# Altium PCB PCB1.PcbDoc
Units mm, origin at the board's own origin, x right, y up, seen from the top; angles counter-clockwise.
Board outline 43 x 27 mm, 2 copper layers (Top Layer, Bottom Layer); 11 components, 9 nets, 29 pads, 0 vias.
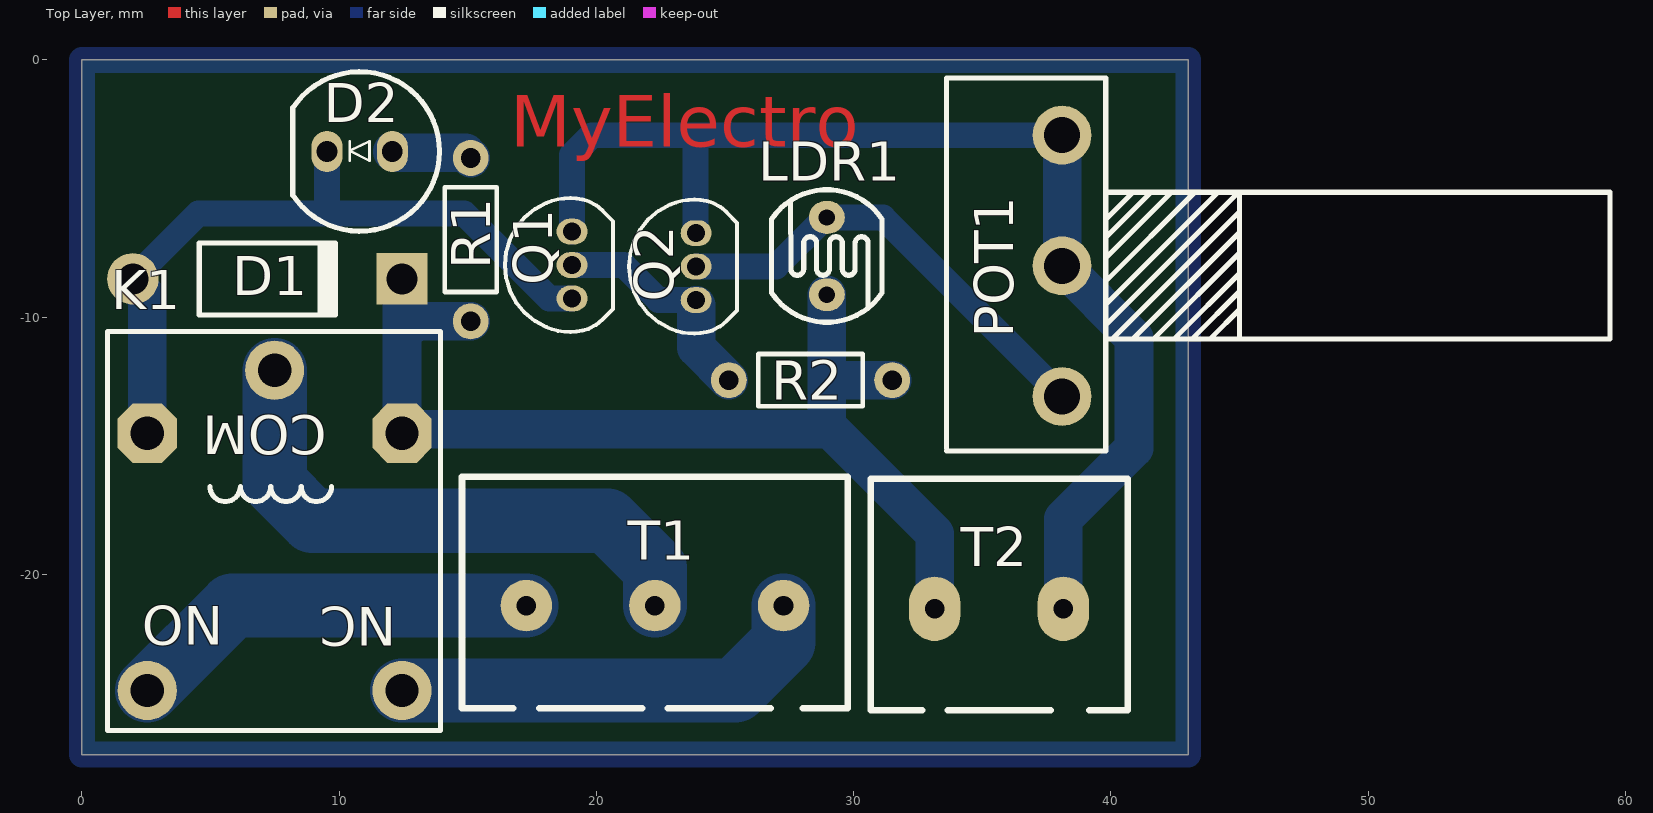
[diagram p0: Top Layer view]
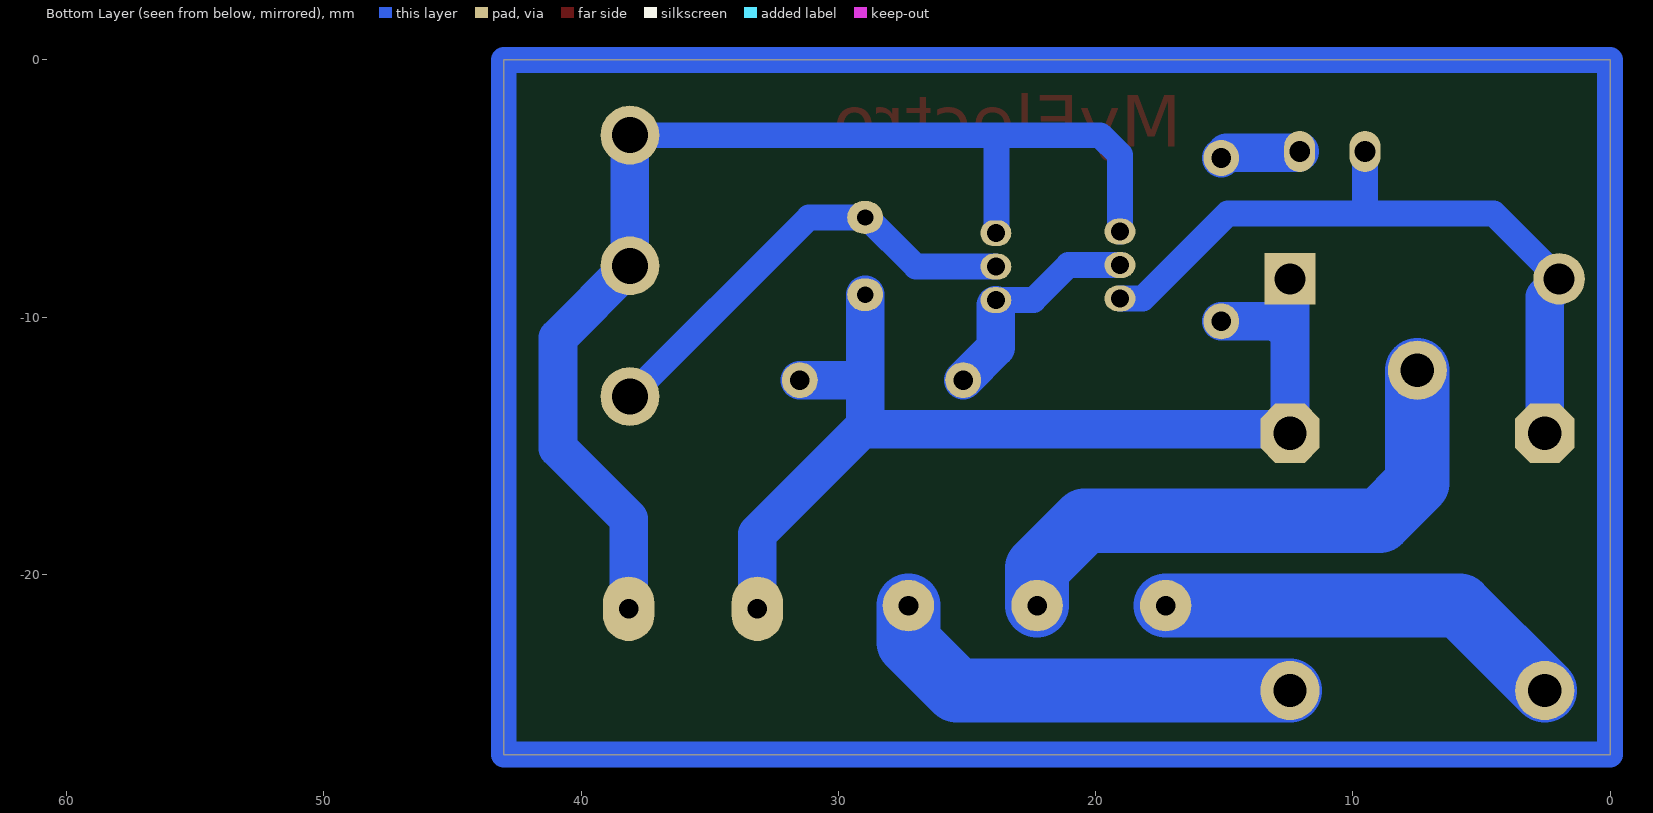
[diagram p1: Bottom Layer view, seen from below]

## Layer stack, top to bottom
Top Solder: solder mask 0.0102, Solder Resist, Dk 3.5
Top Layer: signal copper 0.0356
Dielectric 1: dielectric 0.32, FR-4, Dk 4.8
Bottom Layer: signal copper 0.0356
Bottom Solder: solder mask 0.0102, Solder Resist, Dk 3.5

## Board outline
0,-27 0,0 43,0 43,-27

## Design rules (kind name [scope] priority, off if disabled: settings)
Clearance [All] p1: gap=0.254 ignorepadtopadclearanceinfootprint=FALSE except(0: Arc-Hole Track-Hole SMDPad-Hole THPad-Hole Via-Hole Fill-Hole Poly-Hole Region-Hole Text-Hole)
PolygonConnect [All] p1: connectstyle=Relief reliefconductorwidth=0.254 reliefentries=4 polygonreliefangle="90 Angle" airgapwidth=0.254
RoutingVias [All] p1: holewidth=0.711 width=1.27 viastyle="Through Hole" minholewidth=0.711 minwidth=1.27 maxholewidth=0.711 maxwidth=1.27
SolderMaskExpansion [All] p1: expansion=0.102 istentingtop=FALSE
Width [All] p1: maxlimit=2.5 minlimit=1 preferedwidth=1.5
30 further rules are at their usual default settings.

## Components (designator, comment, footprint, x,y, rotation, side; value= is the part's Value field where it differs from the comment)
D1 "Diode 1N4007" DO-41 7.21,-8.509 r0 top
D2 "LED 5MM" LED5MM_BLUE 10.795,-3.556 r180 top
K1 "Relay" "Relay 15.40x12.10x13.10" 7.49,-12.061 r180 top
LDR1 "PhotoCell" PhotoCell 28.956,-7.62 r270 top
POT1 "100K" POT 38.1,-13.081 r90 top
Q1 "BC547" "TO-92 STR" 19.05,-7.971 r90 top
Q2 "BC547" "TO-92 STR" 23.876,-8.031 r90 top
R1 "1K" RES-(1/4) 15.113,-6.985 r270 top
R2 "1K" RES-(1/4) 28.321,-12.446 r0 top
T1 "Terminal" "Terminal 1*3" 14.772,-25.209 r0 top
T2 "Terminal" "Terminal 1*2" 30.654,-25.273 r0 top

## Footprints (in the part's own frame and the unit in brackets; to place one, negate y for a bottom-side part, rotate by r counter-clockwise, add the part's x,y. Pads: shape width x height; smd on the part's side, far side on the other; paste and mask are expansions set on the pad)
DO-41 [mm] "Diode, Axial; Body 5.2 x 2.7 mm (LxDia. max), Lead Dia. 0.86 mm (max)"
  round 2 hole 1.2: 1(-5.23,0)
  rect 2x2 hole 1.2: 2(5.23,0)
  silkscreen extent -2.65,-1.4 2.75,1.4
LED5MM_BLUE [mm] "LED 5MM THROUGH HOLE BLUE-Designer Abbas Basereh"
  oval 1.2x1.6 hole 0.8: 1(-1.27,0) 2(1.27,0)
  silkscreen extent -3.1,-3.1 2.6,3.1, body extent -2.99,-2.98 2.43,3.04, height 12.31
PhotoCell [mm]
  oval 1.27x1.397 hole 0.635: 1(-1.5,0) 2(1.5,0)
  silkscreen extent -2.58,-2.15 2.58,2.15, body extent -2.61,-2.16 2.61,2.14, height 2.44
POT [mil] "Voloume"
  round 90 hole 55: 1(0,0) 2(400,0) 3(200,0)
  silkscreen extent -83,-839 487,177, body extent -109,-1132 511,193, height 926
"Relay 15.40x12.10x13.10" [mm]
  round 2.3 hole 1.3: 1(0,0) 2(-4.95,12.45) 3(4.95,12.45)
  oct 2.3x2.3 hole 1.3: 4(-4.95,2.45) 5(4.95,2.45)
  silkscreen extent -6.45,-1.5 6.5,14, body extent -6.05,-1.3 6.05,14, height 16.1
RES-(1/4) [mil]
  round 55 hole 30: 1(-125,0) 2(125,0)
  silkscreen extent -80,-40 80,40, body extent -135,-36 135,36, height 115
"Terminal 1*2" [mil]
  oval 78.74x98.43 hole 30: 1(98.15,155) 2(295,155)
  silkscreen extent 0,0 394,354
"Terminal 1*3" [mm]
  round 2 hole 0.762: 1(2.5,4) 2(7.5,4) 3(12.5,4)
  silkscreen extent 0,0 15,9
"TO-92 STR" [mm] "DESIGNER :ABBAS BASEREH"
  oval 1x1.2 hole 0.7 mask+0.06: 1(-1.3,0) 2(0,0) 3(1.3,0)
  silkscreen extent -2.6,-1.59 2.6,2.61, body extent -2.61,-1.59 2.61,2.61, height 10

## Part data
D1: "1 Amp General Purpose Rectifier", Code_JEDEC=DO-204-AL, ComponentLink1Description="Manufacturer Link", ComponentLink1URL=http://www.fairchildsemi.com/, ComponentLink2Description=Datasheet, ComponentLink2URL=http://www.fairchildsemi.com/ds/1N%2F1N4001.pdf, DatasheetVersion=1998, LatestRevisionDate=17-Jul-2002, LatestRevisionNote="Re-released for DXP Platform.", PackageDescription="Diode, Axial; Body 5.2 x 2.7 mm (LxDia. max), Lead Dia. 0.86 mm (max)", PackageReference=DO-41, PackageVersion=Aug-1999, Published=8-Jun-2000, Publisher="Altium Limited"
D2: "Light Emitting Diode", Data=16-12-2016, Designer="Abbas Basereh"
K1: library part "RELAY General", "Relay_SPDT POWER NEEDLE", Company=E.P.I.L, Design_Date=2011/10/31, Designer="Ali Hafizi"
LDR1: library part LDR, "Photo Cell- Variable Resistor With Light", Company="IPA CO.", Designer="Saeid Jorablo", Last Update Time=2008/07/17
POT1: library part POT, "Variable Resistor"
Q1 Q2: "NPN General-purpose Transistor", Data=27-12-2016, Desc.="Plastic Medium-Power. Silicon NPN Transistors", Designer="Abbas Basereh"
R1 R2: library part "RES DIP PACKAGE", "TOTAL DIP RESISTOR PACK", Designer="Ali Hafizi"
T1: library part "Terminal 1*3", "Terminal 3 Pin 250VAC 16A", ComponentLinkURL=www.picpars.com, Designer="Seyed Mohsen Ghasemain", E-mail=picpars@gmail.com
T2: library part "Terminal 1*2", "Terminal 2 Pin 250VAC 16A", ComponentLinkURL=www.picpars.com, Designer="Seyed Mohsen Ghasemain", E-mail=picpars@gmail.com

## Nets (pads, with @x,y where several pads share a name; then routed paths per layer and width w, separated by ;. In a path a pad name is that pad's centre, name@x,y a point inside that pad or via, vN(x,y) a via of type N, cw(c..) or ccw(c..) an arc to the next point about the centre after c; other vN are vias at no path point)
+12: D1.2 K1.4 LDR1.2 R1.2 R2.2 T2.1 | length 42.1
  Bottom Layer w1.5: D1.2 12.44,-10.668 ; R1.2 12.948,-10.16 12.44,-10.668 ; LDR1.2 28.956,-12.319 ; R2.2 29.083,-12.446 28.956,-12.319 ; T2.1 33.147,-18.415 29.083,-14.351 ; 12.44,-10.668 K1.4 12.6,-14.351 29.083,-14.351 ; 28.956,-12.319 28.956,-14.224 29.083,-14.351
GND: POT1.2 POT1.3 Q1.3 Q2.3 T2.2 | length 46.9
  Bottom Layer w1: Q1.3 19.05,-3.683 19.812,-2.921 23.846,-2.921 ; Q2.3 23.846,-6.731 23.846,-2.921 ; POT1.2 23.846,-2.921
  Bottom Layer w1.5: POT1.2 POT1.3 40.894,-10.795 40.894,-15.089 38.147,-17.836 T2.2
NetD1_1: D1.1 D2.2 K1.5 Q1.1 | length 28.2
  Bottom Layer w1: D1.1 4.52,-5.969 9.398,-5.969 ; D2.2 9.525,-5.842 9.398,-5.969 ; Q1.1 18.161,-9.271 14.859,-5.969 9.398,-5.969
  Bottom Layer w1.5: D1.1 1.98,-8.644 2.54,-9.204 K1.5
NetD2_1: D2.1 R1.1 | length 3.2
  Bottom Layer w1.5: D2.1 12.115,-3.606 14.909,-3.606 R1.1
NetK1_1: K1.1 T1.2 | length 22
  Bottom Layer w2.5: K1.1 7.49,-16.443 8.954,-17.907 20.43,-17.907 22.272,-19.749 T1.2
NetK1_2: K1.2 T1.3 | length 17
  Bottom Layer w2.5: K1.2 25.4,-24.511 27.272,-22.639 T1.3
NetK1_3: K1.3 T1.1 | length 16.1
  Bottom Layer w2.5: K1.3 5.842,-21.209 T1.1
NetLDR1_1: LDR1.1 POT1.1 Q2.2 | length 17.9
  Bottom Layer w1: Q2.2 26.982,-8.031 28.893,-6.12 LDR1.1 31.139,-6.12 POT1.1
NetQ1_2: Q1.2 Q2.1 R2.1 | length 8.8
  Bottom Layer w1: Q1.2 21.052,-7.971 22.412,-9.331 Q2.1
  Bottom Layer w1.5: Q2.1@23.876,-9.535 23.876,-11.176 R2.1
copper on no net: | length 140
  Bottom Layer w1: 0,-27 43,-27 43,0 0,0 0,-27

## Other copper
Top Layer:
  text "MyElectro" at 16.656,-3.379 h2

## Text inside footprints (layer, text, board x,y; h text height)
K1: Top Overlay "NC" at 12.214,-21.281 h1.5 r180; Top Overlay "NO" at 5.483,-21.23 h1.5 r180; Top Overlay "COM" at 9.522,-13.839 h1.5 r180